# Altium PCB PCB1.PcbDoc
Units mil, origin at the board's own origin, x right, y up, seen from the top; angles counter-clockwise.
Board outline 2362.2 x 2362.2 mil, 2 copper layers (Top Layer, Bottom Layer); 68 components, 68 nets, 235 pads, 168 vias.
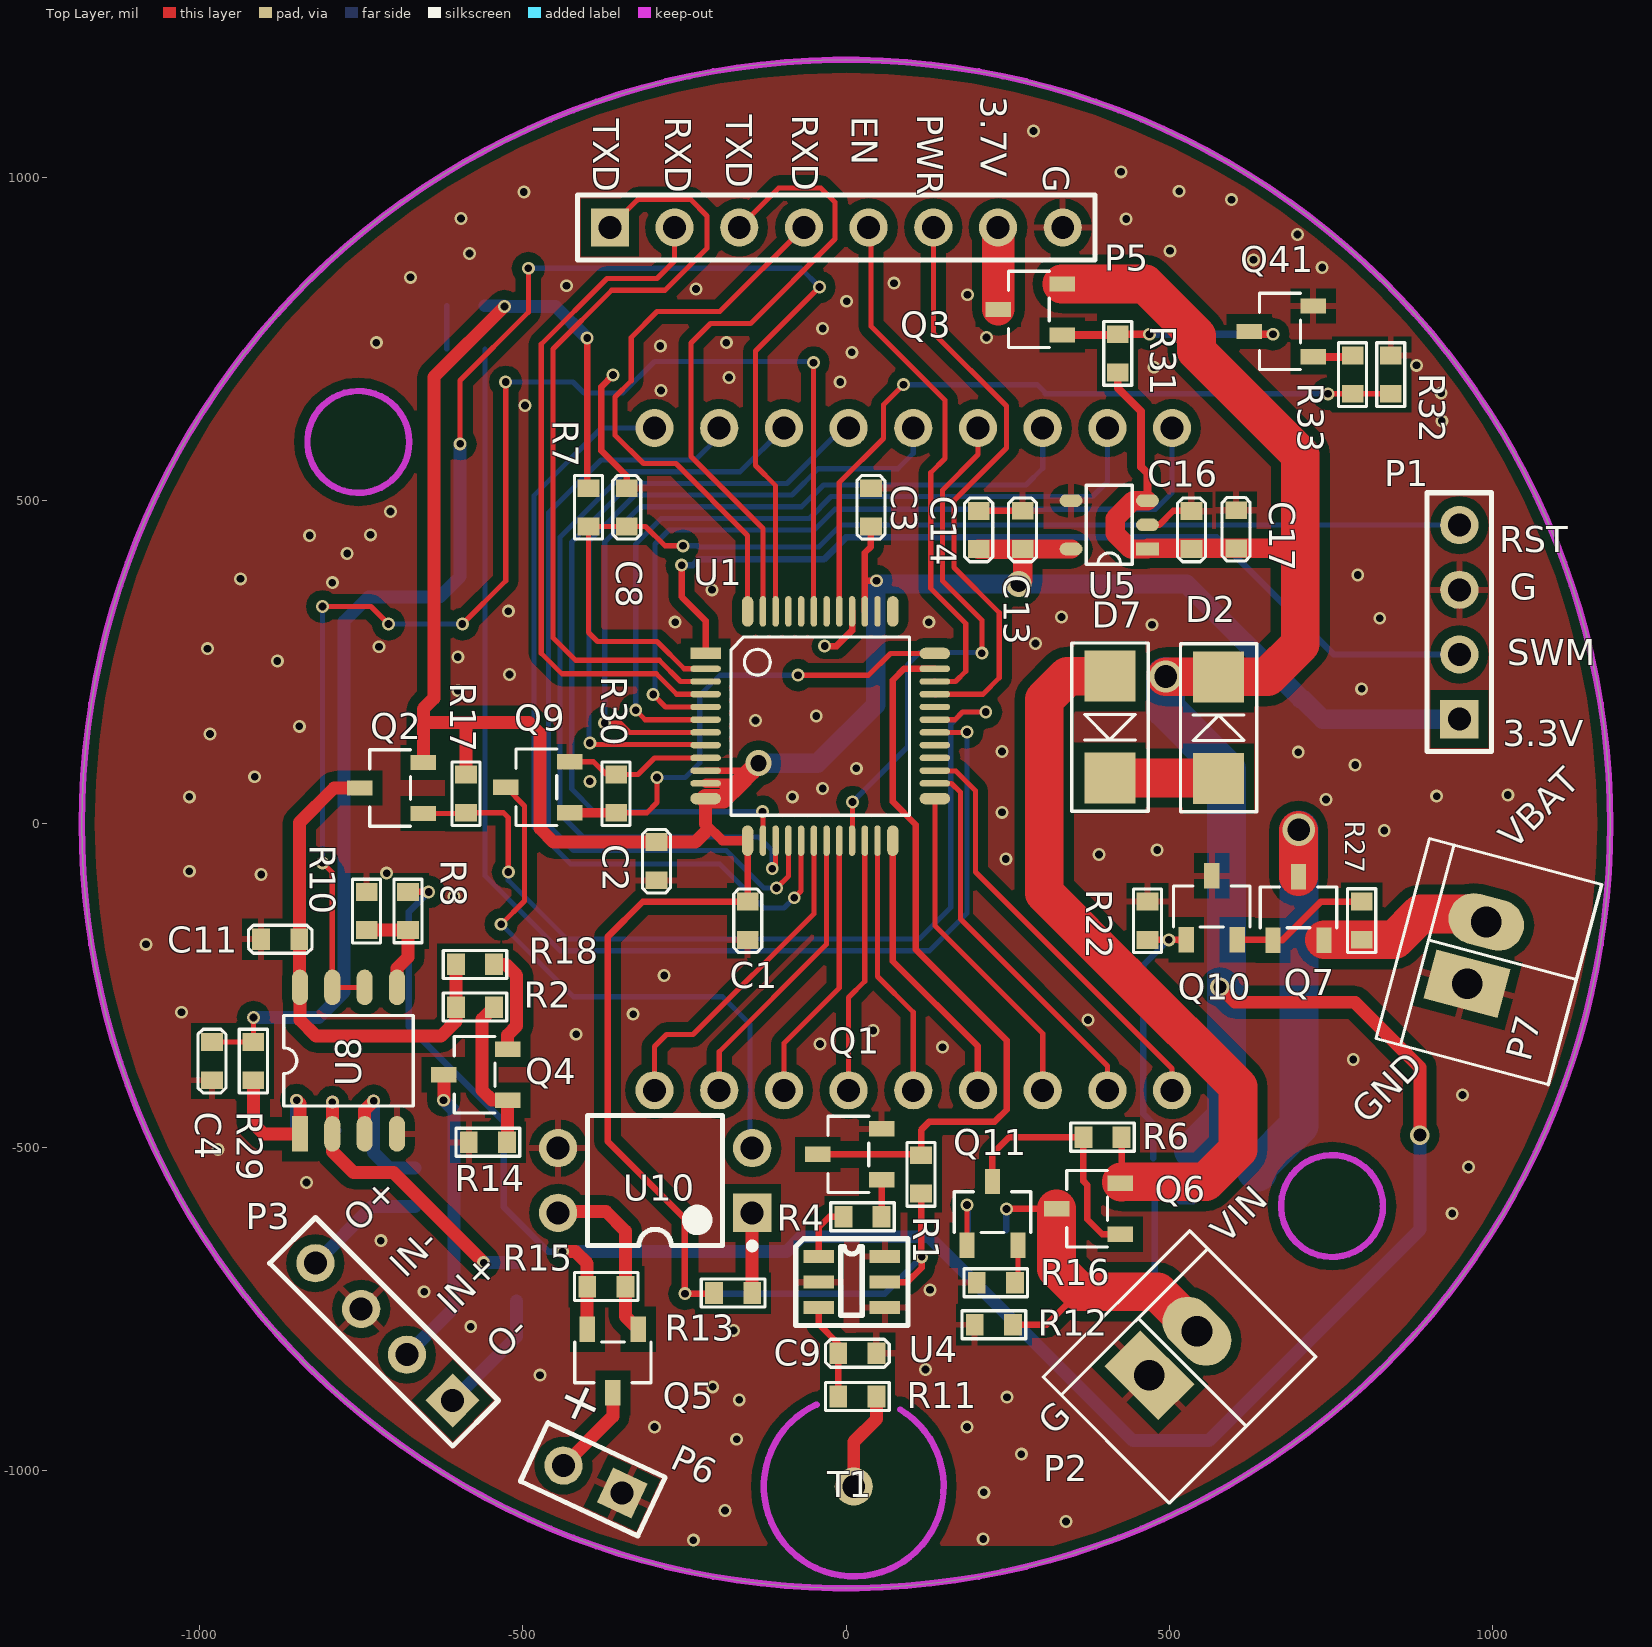
[diagram p0: Top Layer view]
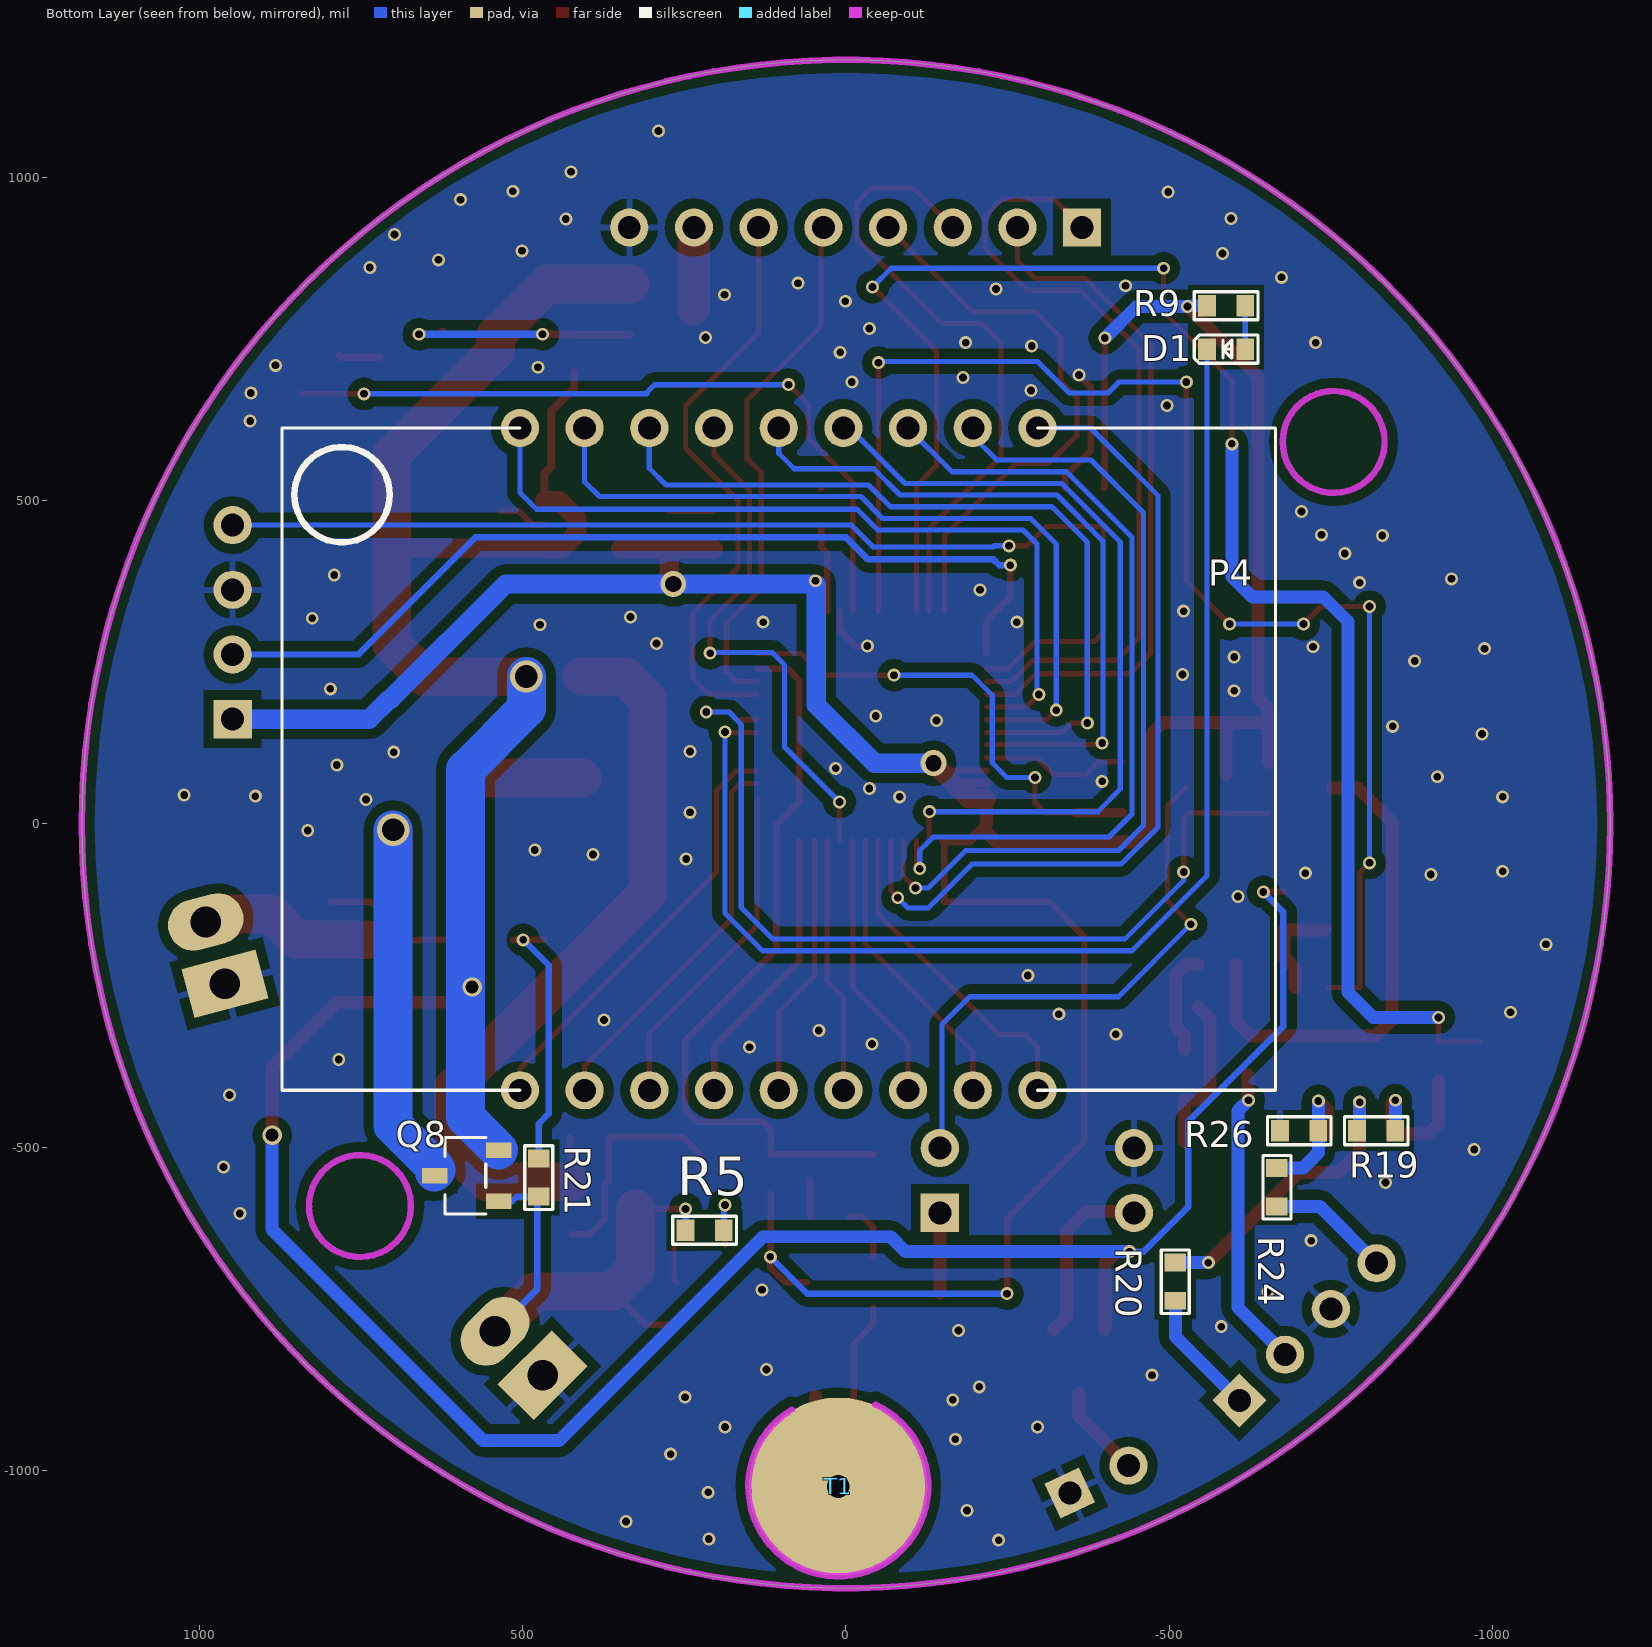
[diagram p1: Bottom Layer view, seen from below]

## Layer stack, top to bottom
Top Layer: signal copper 1.4
Dielectric: core 12.6, FR-4, Dk 4.8
Bottom Layer: signal copper 1.4

## Board outline
-1181.1,0 ccw(c0,0) 0,-1181.1 ccw(c0,0) 1181.1,0 ccw(c0,0) 0,1181.1 ccw(c0,0)

## Design rules (kind name [scope] priority, off if disabled: settings)
Clearance Clearance_1 [InPolygon And InNet(GND)] p1: gap=15
Clearance [All] p2: gap=10
PolygonConnect PolygonConnect_1 [IsVia] p1: connectstyle=Direct reliefconductorwidth=10 reliefentries=4 polygonreliefangle="90 Angle"
PolygonConnect [All] p2: connectstyle=Relief reliefconductorwidth=10 reliefentries=4 polygonreliefangle="90 Angle"
RoutingVias [All] p1: holewidth=28 width=50 viastyle="Through Hole" minholewidth=28 minwidth=50 maxholewidth=28 maxwidth=50
SilkscreenOverComponentPads [All] p1: minsilkscreentomaskgap=10
SolderMaskExpansion [All] p1: expansion=4
Width [All] p1: maxlimit=200 minlimit=8 preferedwidth=10
27 further rules are at their usual default settings.

## Classes and differential pairs
component class power: C4 C11 C13 C14 C16 C17 D2 D7 P2 P3 P6 P7 Q2 Q4 Q5 Q6 Q7 Q8 Q9 Q10 Q11 R2 R3 R5 R6 R12 R13 R14 R15 R16 R17 R18 R19 R20 R21 R22 R24 R26 R27 R29 R30 U5 U8 U10
component class MCU: C1 C2 C3 C8 C9 D1 P1 P4 P5 Q1 Q3 Q41 R1 R4 R7 R8 R9 R10 R11 R31 R32 R33 T1 U1 U4

## Components (designator, comment, footprint, x,y, rotation, side; value= is the part's Value field where it differs from the comment)
C1 "1uF/10V" 0603C -152,-120 r270 top
C2 "0.1uF/10V" 0603C -293,-28 r270 top
C3 "0.1uF/10V" 0603C 38.53,460 r90 top
C4 "0.1uF/10V" 0603C -980,-337 r270 top
C8 "0.1uF/10V" 0603C -339,460 r90 top
C9 "47pF/10V" 0603C -12,-818 r0 top
C11 "0.1uF/10V" 0603C -845,-178 r180 top
C13 "0.1uF/10V" 0603C 273,425 r90 top
C14 "10uF/10V" 0603C 205,484 r270 top
C16 "10uF/10V" 0603C 534,484 r270 top
C17 "0.1uF/10V" 0603C 603,426 r90 top
D1 "LED0" 0603LED -617,734 r0 bottom
D2 "SS16" SMA 576,70 r90 top
D7 "SS16" SMA 408,228.42 r270 top
P1 "Header 4" HDR1X4 948,162 r90 top
P2 "Header 2" 2X2.54MM 469,-852 r45 top
P3 "Header 4" HDR1X4 -608,-891 r135 top
P4 "Header 18" LCD 504,612 r180 bottom locked
P5 "Header 8" HDR1X8 -365,922 r0 top
P6 "Header 2" HDR1X2 -346,-1034 r155 top
P7 "Header 2" 2X2.54MM 960,-247 r75 top
Q1 "S8050" SOT23-3 55,-550 r0 top
Q2 "Si2369DS" SOT23-3 -653.32,16.35 r0 top
Q3 "Si2329DS" SOT23-3 334,756 r0 top
Q4 "MMBT9015" SOT23-3 -523,-427 r0 top
Q5 "Si2369DS" SOT23-3 -321,-781 r90 top
Q6 "Si2369DS" SOT23-3 424,-634 r0 top
Q7 "Si2369DS" SOT23-3 660,-180 r270 top
Q8 "Si2369DS" SOT23-3 537,-583 r180 bottom
Q9 "S8050" SOT23-3 -427.32,17.35 r0 top
Q10 "MMBT9015" SOT23-3 526,-178.69 r270 top
Q11 "S8050" SOT23-3 187,-651 r270 top
Q41 "S8050" SOT23-3 722,722 r0 top
R1 "1K" 0603R 116,-571 r90 top
R2 "10K" 0603R -603,-283 r0 top
R4 "1K" 0603R -4,-607 r0 top
R5 "100K" 0603R 248,-628 r180 bottom
R6 "10K" 0603R 426,-484 r180 top
R7 "10K" 0603R -398,460 r90 top
R8 "100K" 0603R -677,-164 r90 top
R9 "1K" 0603R -558,801 r180 bottom
R10 "100K" 0603R -741,-105 r270 top
R11 "1K" 0603R -12,-885 r0 top
R12 "100K" 0603R 258,-774 r180 top
R13 "100" 0603R -145,-725 r180 top
R14 "10K" 0603R -524,-492 r180 top
R15 "10K" 0603R -341,-715 r180 top
R16 "10K" 0603R 202,-709 r0 top
R17 "10K" 0603R -587.32,76.35 r270 top
R18 "330/1%" 0603R -603,-217 r0 top
R19 "100K" 0603R -790,-474 r180 bottom
R20 "3.3K" 0603R -509,-737 r90 bottom
R21 "1K" 0603R 475,-576 r90 bottom
R22 "100K" 0603R 466,-120 r270 top
R24 "3.3K" 0603R -666,-591 r90 bottom
R26 "100K" 0603R -671,-474 r180 bottom
R27 "100K" 0603R 797,-179 r90 top
R29 "100" 0603R -916,-396.06 r90 top
R30 "10K" 0603R -355.32,76.35 r270 top
R31 "10k" 0603R 420,757 r270 top
R32 "100k" 0603R 842,665 r90 top
R33 "10k" 0603R 783,724 r270 top
T1 "TP" TOUCH-PAD 12,-1024 r0 top
U1 "STM8L152C6T6" TQFP-48 -217,240 r0 top
U4 "RH6030" SOT-23-6 9,-708 r0 top
U5 "TLV70230DBVR" SOT23-5(DBV) 466,425 r180 top
U8 "LM258" so-8 -844,-479 r90 top
U10 "TL181" DIP-4 -295,-551 r180 top

## Footprints (in the part's own frame and the unit in brackets; to place one, negate y for a bottom-side part, rotate by r counter-clockwise, add the part's x,y. Pads: shape width x height; smd on the part's side, far side on the other; paste and mask are expansions set on the pad)
2X2.54MM [mm]
  rect 2x3 hole 1.2: 1(0,0)
  oval 2x3 hole 1.2: 2(2.54,-0.1)
  silkscreen extent -3,-4.1 5.13,2.9
0603C [mm]
  rect 0.7x0.85 smd: 1(0,0) 2(1.5,0)
  silkscreen extent -0.5,-0.55 2,0.55
0603LED [mm]
  rect 0.7x0.85 smd: 1(0,0) 2(1.5,0)
  silkscreen extent -0.5,-0.55 2,0.55
0603R [mm]
  rect 0.7x0.85 smd: 1(0,0) 2(1.5,0)
  silkscreen extent -0.5,-0.55 2,0.55
DIP-4 [mm] "DIP; 4 Leads; Row Spacing 7.62 mm; Pitch 2.54 mm"
  rect 1.5x1.5 hole 0.9: 1(-3.81,1.27)
  round 1.5 hole 0.9: 2(-3.81,-1.27) 3(3.81,-1.27) 4(3.81,1.27)
  silkscreen extent -3.94,-2.55 2.65,2.69, body extent -3.15,-2.5 3.15,2.5, height 5.6
HDR1X2 [mm] "Connector; Header; 2 Position"
  rect 1.5x1.5 hole 0.9: 1(0,0)
  round 1.5 hole 0.9: 2(2.54,0)
  silkscreen extent -1.27,-1.27 3.81,1.27
HDR1X4 [mm]
  rect 1.5x1.5 hole 0.9: 1(0,0)
  round 1.5 hole 0.9: 2(2.54,0) 3(5.08,0) 4(7.62,0)
  silkscreen extent -1.27,-1.27 8.89,1.27
HDR1X8 [mm] "Connector; Header; 8 Position"
  rect 1.5x1.5 hole 0.9: 1(0,0)
  round 1.5 hole 0.9: 2(2.54,0) 3(5.08,0) 4(7.62,0) 5(10.16,0) 6(12.7,0) 7(15.24,0) 8(17.78,0)
  silkscreen extent -1.27,-1.27 19.05,1.27
LCD [mm]
  round 1.5 hole 0.9: 1(0,0) 2(2.54,0) 3(5.08,0) 4(7.62,0) 5(10.16,0) 6(12.7,0) 7(15.24,0) 8(17.78,0) 9(20.32,0) 10(20.32,-26) 11(17.78,-26) 12(15.24,-26) 13(12.7,-26) 14(10.16,-26) 15(7.62,-26) 16(5.08,-26) 17(2.54,-26) 18(0,-26)
  silkscreen extent -9.34,-26 29.66,0
SMA [mm]
  rect 2x2 smd: 1(0,0) 2(4,0)
  silkscreen extent -1.3,-1.5 5.3,1.5
so-8 [mil]
  rect 55x25 smd: 1(0,0)
  oval 55x25 smd: 2(0,-50) 3(0,-100) 4(0,-150) 5(226.38,-150) 6(226.38,-100) 7(226.38,-50) 8(226.38,0)
  silkscreen extent 43,-175 183,25
SOT23-3 [mm]
  rect 1x0.6 smd: 1(0,0) 2(0,2) 3(-2.5,1)
  silkscreen extent -2.1,-0.5 -0.5,2.5
SOT23-5(DBV) [mm]
  rect 0.9x0.5 smd: 1(0,0)
  oval 0.9x0.5 smd: 2(0,-0.95) 3(0,-1.9) 4(3,-1.9) 5(3,0)
  silkscreen extent 0.6,-2.5 2.4,0.6
SOT-23-6 [mm]
  rect 1.2x0.5 smd: 1(-1.3,1) 2(-1.3,0) 3(-1.3,-1) 4(1.3,-1) 5(1.3,0) 6(1.3,1)
  silkscreen extent -2.2,-1.7 2.2,1.7
TOUCH-PAD [mm]
  round 1.5 hole 0.9: 1(0,0)
  round 7 smd far side: ""(0,0)
TQFP-48 [mm]
  rect 1.2x0.45 smd: 1(0,0.6)
  oval 1.2x0.25 smd: 2(0,0) 3(0,-0.5) 4(0,-1) 5(0,-1.5) 6(0,-2) 7(0,-2.5) 8(0,-3) 9(0,-3.5) 10(0,-4) 11(0,-4.5) 26(9,-4.5) 27(9,-4) 28(9,-3.5) 29(9,-3) 30(9,-2.5) 31(9,-2) 32(9,-1.5) 33(9,-1) 34(9,-0.5) 35(9,0)
  oval 1.2x0.45 smd: 12(0,-5.1) 25(9,-5.1) 36(9,0.6)
  oval 0.45x1.2 smd: 13(1.65,-6.75) 24(7.35,-6.75) 37(7.35,2.25) 48(1.65,2.25)
  oval 0.25x1.2 smd: 14(2.25,-6.75) 15(2.75,-6.75) 16(3.25,-6.75) 17(3.75,-6.75) 18(4.25,-6.75) 19(4.75,-6.75) 20(5.25,-6.75) 21(5.75,-6.75) 22(6.25,-6.75) 23(6.75,-6.75) 38(6.75,2.25) 39(6.25,2.25) 40(5.75,2.25) 41(5.25,2.25) 42(4.75,2.25) 43(4.25,2.25) 44(3.75,2.25) 45(3.25,2.25) 46(2.75,2.25) 47(2.25,2.25)
  silkscreen extent 1,-5.75 8,1.25

## Part data
C1 C2 C3 C4 C8 C9 C11 C13 C14 C16 C17: library part Cap, "Capacitor"
D1: "Typical INFRARED GaAs LED"
D2 D7: library part "Diode 1N4148", "High Conductance Fast Diode"
P1 P3: "Header, 4-Pin"
P2 P6 P7: "Header, 2-Pin"
P4: "Header, 18-Pin"
P5: "Header, 8-Pin"
Q1 Q9 Q11: library part NPN
Q2 Q5 Q6 Q7 Q8: library part BUK92150-55A, "BUK92150-55A"
Q3: library part "MOSFET P_1"
Q4 Q10: library part PNP
Q41: library part 2N1069_1
R1 R4 R9 R11: library part Res2, "Resistor"
R2 R5 R6 R7 R8 R10 R12 R13 R14 R15 R16 R17 R18 R19 R20 R21 R22 R24 R26 R27 R29 R30: library part R, "R"
R31 R32 R33: library part RES1
U10: library part Optoisolator1, "4-Pin Phototransistor Optocoupler"

## Via types
v1: diameter 20, hole 12, Top Layer to Bottom Layer, tented both sides, 162 vias
v2: diameter 30, hole 20, Top Layer to Bottom Layer, tented both sides, 2 vias
v3: diameter 40, hole 25, Top Layer to Bottom Layer, tented both sides, 2 vias
v4: diameter 50, hole 35, Top Layer to Bottom Layer, tented both sides, 2 vias

## Nets (pads, with @x,y where several pads share a name; then routed paths per layer and width w, separated by ;. In a path a pad name is that pad's centre, name@x,y a point inside that pad or via, vN(x,y) a via of type N, cw(c..) or ccw(c..) an arc to the next point about the centre after c; other vN are vias at no path point)
FLOW: Q9.1 R30.2 U1.36 | length 750.7
  Top Layer w8: R30.2 -307.71,17.29 -292,33 v1(-292,72) ; v1(-74,230) 35,230 68.62,263.62 U1.36
  Top Layer w15: Q9.1 -355.37,17.35 R30.2
  Bottom Layer w8: v1(-292,72) -248.6,72 -226,94.6 -226,199 -195,230 v1(-74,230)
GND: C1.2 C2.2 C3.2 C4.2 C8.2 C9.2 C11.2 C13.2 C14.1 C16.1 C17.2 P1.3 P2.1 P3.3 P5.8 P6.1 P7.1 Q1.2 Q9.2 Q10.3 Q41.2 R10.1 R12.2 R14.2 R16.1 R22.1 R26.1 R30.1 R32.2 U1.9 U1.40 U4.2 U4.4 U4.6 U5.2 U5.4 U8.4 U10.3 | length 712.3
  Top Layer w8: Q9.2 -390.09,96.09 -370.35,76.35 R30.1 -321.65,76.35 -295.8,102.2 U1.9 ; -273.55,102.2 U1.9 ; U1.9@-216.24,102.97 U1.9
  Top Layer w10: v1(-360,694) -378,676 -378,577 -339,538 C8.2 ; v1(-33,275) -14.62,275 9.38,299 9.38,301.39 U1.40 ; C3.2@38.47,519 C3.2 ; C14.1 272.94,484 C13.2 ; U5.2 484.4,462.4 506,484 C16.1
  other v1: -236,-1107 212,-1105 340,-1078 -187,-1061 213,-1033 271,-974 -169,-951 -296,-932 187,-932 -165,-890 249,-886 -206,-870 -473,-852 123,-843 -174,-783 -580,-777 -652,-723 130,-720 -719,-644 937,-602 -834,-554 962,-530 -971,-503 953,-419 784,-364 149,-345 -40,-340 -417,-325 42,-319 374,-303 -329,-294 -1027,-291 -281,-234 -1082,-186 -606,-112 -904,-78 -710,-76 -1015,-73 247,-54 391,-47 481,-40 832,-10 241,18 742,38 -1015,42 -83,42 913,43 1023,45 -36,55 -396,66 -914,73 16,86 787,91 699,111 241,112 -983,139 -845,151 -140,160 -46,167 -600,206 797,209 -520,231 -879,252 -600,258 -987,271 -722,274 293,279 473,308 -264,312 128,312 825,318 333,320 -522,329 -207,362 -794,373 -936,379 791,385 -771,418 -829,446 -735,447 -704,483 921,623 -496,647 920,666 -286,670 -9,683 -181,690 476,706 882,709 9,729 -287,739 -726,744 -185,744 217,752 -36,766 1,808 188,818 -232,827 -432,832 74,836 -673,845 736,860 630,872 -582,882 501,886 698,911 433,935 -595,936 596,965 -498,977 515,978 425,1008 290,1071
GNSS_EN_IN: P5.5 U1.34 | length 821.6
  Top Layer w8: P5.5 38.53,918.47 38.53,769.47 153,655 153,565 131,543 131,364 185,310 185,236 169.31,220.31 U1.34 U1.34@136.57,221.08
LCD_COM0: P4.1 U1.5 | length 1254.9
  Top Layer w8: v1(-298,200) -278.94,180.94 U1.5
  Bottom Layer w8: v1(-298,200) -295,203 -295,433 -273.61,454.39 -49.11,454.39 -17,486.5 478.5,486.5 504,512 P4.1
LCD_COM1: P4.2 U1.6 | length 1222.9
  Top Layer w8: v1(-325,176) -310.26,161.26 U1.6
  Bottom Layer w8: v1(-325,176) -325,433 -285.61,472.39 -56.56,472.39 -22.96,506 381,506 404,529 P4.2
LCD_COM2: P4.3 U1.7 | length 1228.2
  Top Layer w8: v1(-373,156) -349,156 -334.57,141.57 U1.7
  Bottom Layer w8: v1(-373,156) -373,436 -318.61,490.39 -68.61,490.39 -35,524 278,524 304,550 P4.3
LCD_COM3: P4.4 U1.21 | length 826.5
  Top Layer w8: U1.21 10,-25.13 v1(10,34) ; P4.4 204,571 149,516 149,376 210,315 v1(210,264)
  Bottom Layer w8: v1(10,34) 95,119 95,246 114,265 209,265 v1(210,264)
LCD_SEG0: P4.5 U1.8 | length 1089.3
  Top Layer w8: v1(-396,125) -393.65,122.65 -217.76,122.65 U1.8
  Bottom Layer w8: v1(-396,125) -397,126 -397,437.46 -326.06,508.39 -83.61,508.39 -43,549 80,549 104,573 P4.5
LCD_SEG1: P4.6 U1.14 | length 1236.5
  Top Layer w8: U1.14 v1@-128.42,18.42
  Bottom Layer w8: v1(-129,19) -389,19 -424,54 -424,423 -424,435.91 -333.52,526.39 -91.06,526.39 -5.46,612 P4.6
LCD_SEG2: P4.7 U1.15 | length 1268.6
  Top Layer w8: v1(-114,-69) -114,-68 -108.73,-62.73 U1.15
  Bottom Layer w8: v1(-114,-69) -114,-41 -135,-20 -406.6,-20 -442,15.4 -442,443.37 -340.97,544.39 -163.61,544.39 P4.7
LCD_SEG3: P4.8 U1.16 | length 1288.1
  Top Layer w8: v1@-101.57,-99 v1(-107.43,-99) -89.05,-80.62 U1.16
  Bottom Layer w8: P4.8 -196,599.39 -233,562.39 -378.61,562.39 -460,481 -460,-2 -421,-41 -185,-41 -127,-99 v1(-107.43,-99)
LCD_SEG4: P4.9 U1.17 | length 1295.4
  Top Layer w8: v1(-80,-114) -69.36,-103.36 U1.17
  Bottom Layer w8: P4.9 -378,612 -482,508 -482,-5.46 -425.46,-62 -195,-62 -127,-130 -96,-130 v1(-80,-114)
LCD_SEG5: P4.10 U1.18 | length 511.9
  Top Layer w8: P4.10 -296,-344 -277.52,-325.53 -236.52,-325.53 -49.68,-138.68 U1.18
LCD_SEG6: P4.11 U1.19 | length 454.6
  Top Layer w8: P4.11 -196,-352 -29.99,-185.99 -29.99,-135 U1.19
LCD_SEG7: P4.12 U1.20 | length 421.4
  Top Layer w8: P4.12 -96,-339 -10.31,-253.31 -10.31,-138 U1.20
LCD_SEG8: P4.13 U1.22 | length 396.3
  Top Layer w8: P4.13 4,-268 29.06,-242.94 U1.22
LCD_SEG9: P4.14 U1.23 | length 408.8
  Top Layer w8: U1.23 48.75,-235.75 104,-291 P4.14
LCD_SEG10: P4.15 U1.24 | length 440.4
  Top Layer w10: U1.24 72.37,-212 204,-343.63 P4.15
LCD_SEG11: P4.16 U1.25 | length 519.9
  Top Layer w8: U1.25 137.33,-157.33 304,-324 P4.16
LCD_SEG12: P4.17 U1.26 | length 600
  Top Layer w8: U1.26 163.17,62.83 177,49 177,-147 404,-374 P4.17
LCD_SEG13: P4.18 U1.27 | length 664.5
  Top Layer w8: U1.27 138.1,81.75 169.7,81.75 200,51.46 200,-74 504,-378 P4.18
NetC9_1: C9.1 R11.1 U4.3 | length 150.1
  Top Layer w10: U4.3 -42.18,-773 -12,-803.18 C9.1 R11.1
NetD1_1: D1.1 R9.2 | length 67
  Bottom Layer w8: R9.2 -617.06,734.06 D1.1
NetD1_2: D1.2 U1.30 | length 1960.9
  Top Layer w8: U1.30 186.57,141.57 v1(187,142)
  Bottom Layer w8: D1.2 -557.94,-80.06 -442,-196 129,-196 187,-138 v1(187,142)
NetD2_1: D2.1 D7.2 | length 168.4
  Top Layer w60: D7.2 575.06,70.94 D2.1
NetD7_1: D7.1 Q6.2 R6.1 | length 1208.8
  Top Layer w10: Q6.2 426,-553.26 R6.1
  Top Layer w60: D7.1 342.43,228.42 306.5,192.5 306.5,-106.64 432.7,-232.83 606,-406.14 606,-503 556,-553 426.26,-553 Q6.2@426,-553.26
NetP5_7: P5.7 Q3.3 | length 126.9
  Top Layer w50: P5.7 235.57,921.43 Q3.3
NetP6_2: P6.2 Q5.3 | length 143.9
  Top Layer w20: P6.2 -360.37,-915.48 Q5.3
NetQ1_1: Q1.1 R4.2 | length 57
  Top Layer w10: Q1.1 55,-606.94 R4.2
NetQ3_1: Q3.1 Q41.3 R31.1 | length 364.6
  Top Layer w12: Q3.1 419,756 R31.1 v1(469,757) ; Q41.3 627.94,757 v1(660,757)
  Bottom Layer w12: v1(469,757) v1(660,757)
NetQ4_1: Q4.1 R2.2 R14.1 | length 246.3
  Top Layer w20: R2.2 -562.69,-301.74 -562.69,-411.31 -547,-427 Q4.1 R14.1@-523,-491
NetQ4_2: Q4.2 R18.2 | length 162
  Top Layer w20: R18.2 -526,-217 -509,-234 -509,-312 -523,-326 Q4.2
NetQ5_1: Q5.1 R15.1 U10.4 | length 277.5
  Top Layer w20: U10.4 -443,-599 -371,-599 -341,-629 R15.1 -341,-761 Q5.1
NetQ6_1: Q6.1 Q11.3 R6.2 | length 384.2
  Top Layer w10: Q11.3 226.37,-509.63 252,-484 R6.2 366.94,-551.94 373,-558 373,-611 396,-634 Q6.1
NetQ7_1: Q7.1 Q10.2 R27.2 | length 217.7
  Top Layer w10: Q10.2 658.69,-178.69 Q7.1 674,-180 734.06,-119.94 R27.2
NetQ7_3: Q7.3 Q8.3 | length 631.5
  Top Layer w60: Q7.3 v4@699.37,-9.63
  Bottom Layer w60: Q8.3@633.43,-535.03 636.39,-537.99 636.39,-529.58 700,-465.97 v4(700,-9)
NetQ9_3: Q9.3 U10.2 | length 880
  Top Layer w8: v1(-533,-155) -497,-119 -497,27.98 Q9.3
  Bottom Layer w8: v1(-533,-155) -421,-267 -191,-267 -148.53,-309.47 -148.53,-497.47 U10.2
NetQ10_1: Q10.1 R21.2 R22.2 | length 409.1
  Top Layer w10: R22.2 513.06,-179.06 514,-180
  Bottom Layer w10: R21.2 475,-463.12 459.47,-447.59 459.47,-218.53 v1(499,-179)
NetQ11_1: Q11.1 R5.2 | length 101.8
  Top Layer w8: Q11.1 v1(187,-589)
  Bottom Layer w8: v1(187,-589) 188.94,-590.94 R5.2
NetQ11_2: Q11.2 R16.2 | length 59.9
  Top Layer w8: R16.2 265.74,-704.31 Q11.2
NetQ41_1: Q41.1 R33.1 | length 61.8
  Top Layer w12: Q41.1 781,722 R33.1
NetR4_1: R4.1 U4.1 | length 90.3
  Top Layer w10: U4.1 -42.18,-623.18 -26,-607 R4.1
NetR8_1: R8.1 R10.2 U8.5 | length 159.7
  Top Layer w20: R10.2 -677.06,-164.06 R8.1 -677,-206 -694,-223 U8.5
NetR11_2: R11.2 T1.1 | length 153.5
  Top Layer w20: T1.1 12,-955 47.06,-919.94 R11.2
NetR13_1: R13.1 U10.1 | length 124
  Top Layer w20: R13.1 U10.1
NetR19_1: R19.1 R20.2 U8.2 | length 477.8
  Top Layer w20: v1(-794,-430) U8.2 -794,-506 -761,-539 -699,-539 v1(-560,-678)
  Bottom Layer w20: v1(-794,-430) -794,-470 R19.1 ; v1@-559.94,-677.94 R20.2
NetR19_2: R19.2 R29.1 U8.1 | length 246.8
  Top Layer w20: R29.1 -916,-463 -900,-479 U8.1 -844,-432 v1(-849.06,-426.94)
  Bottom Layer w20: R19.2 v1(-849.06,-426.94)
NetR24_2: R24.2 R26.2 U8.3 | length 210.6
  Top Layer w20: U8.3 -744,-442 v1(-730.06,-428.06)
  Bottom Layer w20: v1(-730.06,-428.06) R26.2 -730.06,-507.94 -706.06,-531.94 R24.2
OUT+: P3.4 R24.1 | length 198.5
  Bottom Layer w20: P3.4@-820.13,-670.87 P3.4 -732.26,-591 R24.1
OUT-: P3.1 R20.1 | length 195
  Bottom Layer w20: P3.1 -509,-792 R20.1
P1: P3.2 Q4.3 | length 469.1
  Top Layer w20: v1@-621.43,-426.43 Q4.3
  Bottom Layer w20: P3.2 -605.71,-747.29 -605.71,-443.29 v1(-622,-427)
POWER: R32.1 R33.2 U1.41 | length 1152.3
  Top Layer w8: U1.41 -10.31,527.69 58,596 58,648 v1(89,679) ; v1(745.06,664.94) R33.2 783.06,665 R32.1
  Bottom Layer w8: v1(89,679) v1@90,679 ; v1@89.5,679.5 v1@90,679 ; v1(745.06,664.94) 308,664.94 308,667 296,679 v1@90,679
PWRKEY_IN: P5.6 U1.33 | length 921.6
  Top Layer w8: U1.33@138.1,199.87 U1.33 211.63,200.63 237,226 237,326.53 167,396.53 167,500 248,581 248,646 135,759 P5.6 P5.6@138.53,918.47
RST: C8.1 P1.4 R7.1 U1.2 | length 1746.8
  Top Layer w8: v1@-255,427 v1(-252,430) -280,430 -310,460 C8.1 R7.1 -398,296 -384,282 -292.09,282 -250.09,240 U1.2
  Bottom Layer w8: v1(-252,430) -230,430 ; -229,430 -230,430 ; P1.4 900,462 -8,462 -42,428 -228,428 -230,430
SENSOR_EN: Q2.1 R17.2 U1.31 | length 1438.1
  Top Layer w8: Q2.1 -588.26,16.35 R17.2 -529.29,17.29 -522,10 -522,2 ; v1(-522,-74) -522,2 ; -522,-34 -522,2 ; U1.31 168.26,161.26 180,173 v1(216,173)
  Bottom Layer w8: v1(-522,-74) -522,-87 -431,-178 113,-178 162,-129 162,154 181,173 v1(216,173)
SENSOR_OUT: C4.1 R29.2 U1.46 | length 2577
  Top Layer w8: C4.1 R29.2 v1(-916,-299) ; v1(-596.4,587.6) -596.4,685.6 -491,791 v1(-491,859) ; U1.46 -108.73,522.73 -140,554 -140,707 -140,731 v1(-41,830)
  Bottom Layer w8: v1(-491,859) -70,859 v1(-41,830)
  Bottom Layer w20: v1(-916,-299) -815,-299 -776,-260 -776,313 -738,351 -628,351 -596.4,382.6 v1(-596.4,587.6)
SIM800_VBAT: C16.2 C17.1 D2.2 Q3.2 Q5.2 Q8.2 R8.2 R15.2 R31.2 U5.1 U5.3 | length 5486.5
  Top Layer w10: R8.2 v1(-645.06,-104.94)
  Top Layer w12: R31.2 420,674 456,638 456,552 466,542 U5.3
  Top Layer w20: v1(-438,-661) -418.06,-661 -400.06,-679 R15.2 R15.2@-400.06,-718.69 ; Q5.2 -400.06,-780.69 R15.2@-400.06,-718.69 ; R15.2@-399.74,-719 R15.2@-400.06,-718.69 ; v2(578,-252) 601.5,-275.5 786.5,-275.5 887,-376 v2(887,-481)
  Top Layer w30: U5.3 443.8,499.8 416,472 416,449 440,425 U5.1 467,426 C17.1 686,426 702,410
  Top Layer w60: Q3.2 461.97,834.74 542,754.71 542,731 702,571 702,410 702,278 651.48,227.48 D2.2 v4@494.52,227.48
  Bottom Layer w10: v1(-645.06,-104.94) -676,-135.89 -676,-313 -650.5,-338.5 -529,-460 -529,-592 -460,-661 v1(-438,-661)
  Bottom Layer w20: v1(-438,-661) -92,-661 -69,-638 128.43,-638 443.65,-953.22 560.78,-953.22 887,-627 v2(887,-481) ; Q8.2@537,-509.31 Q8.2
  Bottom Layer w60: v4(494,228) 494,178 588,84 588,-453.26 Q8.2
SWIM: P1.2 U1.1 | length 1446.5
  Top Layer w10: v1(-254,400) -254,351 -217,314 U1.1
  Bottom Layer w10: v1(-254,400) -237,400 -228,409 -34.13,409 -0.13,443 573,443 754,262 P1.2
TOUCH: Q1.3 R1.2 U1.35 | length 1156.2
  Top Layer w10: Q1.3@-43,-510.2 Q1.3 ; Q1.3@-42.11,-511.94 Q1.3 ; U1.35 90.47,240 90.24,240.24 72.37,222.37 72.37,34.63 108,-1 108,-194 248.53,-334.53 248.53,-441.47 230,-460 129,-460 116,-473 R1.2 114.69,-510.63 Q1.3
UART1_RXD: P5.2 U1.4 | length 1068.9
  Top Layer w8: P5.2 -265,870 -292,843 -369.46,843 -471,741.46 -471,264 -439.22,232.22 -293.22,232.22 -261.63,200.63 U1.4
UART1_TXD: P5.1 U1.3 | length 1241.3
  Top Layer w8: P5.1 -322.14,964.86 -321.93,964.86 -321.27,965.53 -240.53,965.53 -215,940 -215,890 -280,825 -362,825 -453,734 -453,288 -418,253 -288.54,253 -255.86,220.31 U1.3
UART3_RXD: P5.4 U1.48 | length 885.4
  Top Layer w8: U1.48@-152,328.62 U1.48 -152.04,446.04 -263,557 -313,557 -357,601 -357,660 -331.87,685.13 -331.87,752.13 -292,792 -195,792 P5.4
UART3_TXD: P5.3 U1.47 | length 989.3
  Top Layer w8: P5.3 -104,983 -39,983 -17,961 -17,904 -147.37,773.63 -209.37,773.63 -239.53,743.47 -239.53,644 -239.53,568 -128.42,456.89 U1.47
VBAT_ADC: U1.43 U8.6 U8.7 | length 2166.5
  Top Layer w8: v1(-809,-60) -794,-75 U8.7 U8.6 ; v1(-809,336) -734,336 v1(-707,309) ; v1(-593,309) -526,376 v1(-526,683) v1@-531,683 ; v1(-50.35,713) -50.35,329.25 U1.43
  Bottom Layer w8: v1(-809,-60) v1(-809,336) ; v1(-707,309) v1(-593,309) ; v1(-526,683) -422,683 -405,666 -345,666 -296,715 v1@-50.35,715
VBAT_IN: P7.2 Q7.2 R27.1 | length 271.7
  Top Layer w60: Q7.2@739.74,-179 R27.1 848,-179 888,-139 977.26,-139 P7.2
VCC_3V: C1.1 C2.1 C3.1 C13.1 C14.2 P1.1 Q2.2 R1.1 R7.2 R9.1 R13.2 R17.1 U1.10 U1.11 U1.12 U1.13 U1.39 U4.5 U5.5 | length 5489.8
  Top Layer w10: v1(-400,751) -400,521.06 R7.2 ; U1.10@-217,82.28 v3@-146.72,82.28 ; R13.2 -205.06,-726 v1(-249,-726) -249,-610 -368.5,-490.5 -368.5,-174.5 -314,-120 C1.1 -152.04,-119.96 U1.13 ; U1.39 29.06,376 ; C3.1 38.53,428.53 29.06,419.06 29.06,376 ; v1(47,376) 29.06,376 ; U4.5 94.8,-708 117,-685.8 v1(117,-669) v1@116,-668 ; v1@115.37,-668.63 v1@116,-668 ; R1.1 v1@116,-668
  Top Layer w15: -217,0 -191.25,-25.75 U1.13 ; U1.11 -166.17,62.83
  Top Layer w20: Q2.2 -653.32,157 ; R17.1 -587.32,154.31 ; v1(-528,800) -637,691 -637,194.31 -653.32,178 -653.32,157 ; -217,-12 -233,-28 C2.1 -452,-28 -473,-7 -473,140 -490,157 -653.32,157 ; -217,0 U1.12
  Top Layer w30: U1.12 -189.79,39.21 -166.17,62.83 v3@-146.72,82.28 ; 241,424.94 C14.2 272.94,424.94 C13.1 ; v3@273,377 C13.1 ; U5.5 C13.1
  Bottom Layer w10: v1(-249,-726) -91,-726 60,-726 v1(117,-669)
  Bottom Layer w20: R9.1 -529,801 v1(-528,800) -449,800 v1(-400,751)
  Bottom Layer w30: v3(-135,94) -44,94 46,184 v1@46,370 ; v1@52,371 v3(267,371) 526,371 703.19,193.81 ; 707.09,191.91 737,162 P1.1
VCC_3V_SENSOR: C11.1 Q2.3 R2.1 R18.1 U8.8 | length 769.8
  Top Layer w20: Q2.3 -791.28,55.72 -845,2 C11.1 -845,-251.62 U8.8 -844,-303 -819,-328 -626,-328 -603,-305 R2.1 R18.1
VCC_IN: P2.2 Q6.3 Q8.1 R5.1 R12.1 R21.1 | length 891.8
  Top Layer w10: v1@248,-594.63 Q6.3 ; R12.1 310,-774 361,-723
  Top Layer w60: Q6.3 325.57,-687.57 361,-723 481.42,-723 P2.2 P2.2@536,-777.58
  Bottom Layer w10: R5.1 v1(248,-595) ; Q8.1 516,-583 509,-576 477,-576 477,-718.58 P2.2
pads on no net: T1. U1.28 U1.29 U1.32 U1.37 U1.38 U1.42 U1.44 U1.45

## Polygon pours and split planes (outlines as drawn)
GND on Top Layer "Top Layer-No Net" (solid, remove dead copper, pour order 1000): -1475.73,1360.27 -1425.73,1310.27 962.27,1310.27 962.27,937.27 1297.27,602.27 1291.27,596.27 1291.27,-369.73 1291.27,-496.73 874.27,-913.73 672.27,-1115.73 -913.73,-1115.73 -913.73,-912.73 -1437.73,-388.73 -1317.73,-268.73 -1317.73,1323.27
GND on Bottom Layer "Top Layer-No Net" (solid, remove dead copper, pour order 1001): -1429.18,1360.18 1453.82,1360.18 1453.82,-1134.82 1437.61,-1147.82 1319.14,-1242.82 -1138.64,-1242.82 -1138.64,-1140.82 -1374.32,-951.82 -1311.97,-901.82 -1311.97,1366.18

## Keep-outs
Keep-Out Layer:
  circle w10: c751.26,-590.55 r78.74
  circle w10: c-753.74,590.55 r78.74
  circle w10: c0,0 r1181.1
  lines w10: -45.38,-897.38 ccw(c12,-1024) 83.82,-904.98

## Silkscreen, mask and mechanical layers (free items; w line width, h text height)
Top Overlay:
  text "3.7V" at 208,1125 h40 r270
  text "PWR" at 110,1097 h40 r270
  text "TXD" at -185,1096 h40 r270
  text "RXD" at -83,1096 h40 r270
  text "EN" at 9,1094 h40 r270
  text "RXD" at -279,1093 h40 r270
  text "TXD" at -391,1090 h40 r270
  text "G" at 305,1018 h40 r270
  text "RST" at 1010,420 h40
  text "G" at 1026,347 h40
  text "SWM" at 1022,245 h40
  text "3.3V" at 1015,120 h40
  text "VBAT" at 1033,-41 h40 r45
  text "GND" at 806,-466 h40 r45
  text "O+" at -753,-633 h40 r45
  text "VIN" at 588,-651 h40 r45
  text "IN-" at -681,-704 h40 r45
  text "IN+" at -608,-761 h40 r45
  text "O-" at -532,-829 h40 r45
  text "+" at -368,-887 h60 r155
  text "G" at 321,-947 h40 r45
Mechanical 1:
  circle w10: c751.26,-590.55 r78.74
  circle w10: c-753.74,590.55 r78.74
  circle w10: c0,0 r1181.1